# EAGLE board CT_schematic (EAGLE 7.6.0)

Size 100 x 80 mm. Coordinates in mm from the lower left corner, seen from the top.
Outline: 0,0 100,0 100,80 0,80 0,0
Copper layers (1*16): Top 0.035mm / dielectric 1.5mm / Bottom 0.035mm
Design rules "default": minimum track width 10mil, minimum drill 24mil, track to track 8mil, track to pad 8mil, pad to pad 8mil, via to via 8mil, smd to smd 8mil, copper to edge 40mil, drill to drill 8mil, minimum pad ring 10mil, minimum via ring 8mil, stop-mask expansion 4mil, vias tented up to drill 0mil, thermal gap 10mil

## Footprints (pad centres in the part's own frame; a part is rotated, then mirrored left to right if it is on the bottom)
C0603 = smd 0.8 x 0.8: 1 -0.762,0; 2 0.762,0
C0402 = smd 0.5 x 0.5: 1 -0.508,0; 2 0.508,0
C1210 = smd 1.2 x 2.5: 1 -1.524,0; 2 1.524,0
C0805 = smd 1.2 x 1.3: 1 -1.016,0; 2 1.016,0
C1206 = smd 1.3 x 1.6: 1 -1.524,0; 2 1.524,0
L0603 = smd 0.8 x 0.8: 1 -0.762,0; 2 0.762,0
DR1040 = smd 1.6 x 3.2: 1 -4.458,0; 2 4.458,0
L1210 = smd 1.2 x 2.5: 1 -1.524,0; 2 1.524,0
R0603 = smd 0.8 x 0.8: 1 -0.762,0; 2 0.762,0
LQFP100 = smd 0.3 x 1.2: 1 -6,-7.75; 2 -5.5,-7.75; 3 -5,-7.75; 4 -4.5,-7.75; 5 -4,-7.75; 6 -3.5,-7.75; 7 -3,-7.75; 8 -2.5,-7.75; 9 -2,-7.75; 10 -1.5,-7.75; 11 -1,-7.75; 12 -0.5,-7.75; 13 0,-7.75; 14 0.5,-7.75; 15 1,-7.75; 16 1.5,-7.75; 17 2,-7.75; 18 2.5,-7.75; 19 3,-7.75; 20 3.5,-7.75; 21 4,-7.75; 22 4.5,-7.75; 23 5,-7.75; 24 5.5,-7.75; 25 6,-7.75; 51 6,7.75; 52 5.5,7.75; 53 5,7.75; 54 4.5,7.75; 55 4,7.75; 56 3.5,7.75; 57 3,7.75; 58 2.5,7.75; 59 2,7.75; 60 1.5,7.75; 61 1,7.75; 62 0.5,7.75; 63 0,7.75; 64 -0.5,7.75; 65 -1,7.75; 66 -1.5,7.75; 67 -2,7.75; 68 -2.5,7.75; 69 -3,7.75; 70 -3.5,7.75; 71 -4,7.75; 72 -4.5,7.75; 73 -5,7.75; 74 -5.5,7.75; 75 -6,7.75 | smd 1.2 x 0.3: 26 7.75,-6; 27 7.75,-5.5; 28 7.75,-5; 29 7.75,-4.5; 30 7.75,-4; 31 7.75,-3.5; 32 7.75,-3; 33 7.75,-2.5; 34 7.75,-2; 35 7.75,-1.5; 36 7.75,-1; 37 7.75,-0.5; 38 7.75,0; 39 7.75,0.5; 40 7.75,1; 41 7.75,1.5; 42 7.75,2; 43 7.75,2.5; 44 7.75,3; 45 7.75,3.5; 46 7.75,4; 47 7.75,4.5; 48 7.75,5; 49 7.75,5.5; 50 7.75,6; 76 -7.75,6; 77 -7.75,5.5; 78 -7.75,5; 79 -7.75,4.5; 80 -7.75,4; 81 -7.75,3.5; 82 -7.75,3; 83 -7.75,2.5; 84 -7.75,2; 85 -7.75,1.5; 86 -7.75,1; 87 -7.75,0.5; 88 -7.75,0; 89 -7.75,-0.5; 90 -7.75,-1; 91 -7.75,-1.5; 92 -7.75,-2; 93 -7.75,-2.5; 94 -7.75,-3; 95 -7.75,-3.5; 96 -7.75,-4; 97 -7.75,-4.5; 98 -7.75,-5; 99 -7.75,-5.5; 100 -7.75,-6
SOIC-8 = smd 1.6 x 0.6: 1 -2.7,1.905 | smd 1.55 x 0.6: 2 -2.7,0.635; 3 -2.7,-0.635; 4 -2.7,-1.905; 5 2.7,-1.905; 6 2.7,-0.635; 7 2.7,0.635; 8 2.7,1.905
SAMTEC_FTSH-105-01-L-DV-K = smd 0.762 x 2.794: 1 -2.54,-2.032; 2 -2.54,2.032; 3 -1.27,-2.032; 4 -1.27,2.032; 5 0,-2.032; 6 0,2.032; 7 1.27,-2.032; 8 1.27,2.032; 9 2.54,-2.032; 10 2.54,2.032
182-009-MALE = drill 1.194 pad 1.524 octagon: 1 -5.537,10.923; 2 -2.769,10.923; 3 0,10.923; 4 2.769,10.923; 5 5.537,10.923; 6 -4.153,8.08; 7 -1.384,8.08; 8 1.384,8.08; 9 4.153,8.08 | hole 3.048: -12.446,9.501; 12.446,9.501
WFDN-8 = smd 0.48 x 0.7: 1 0,0; 2 1.27,0; 3 2.54,0; 4 3.81,0; 5 3.81,4.45; 6 2.54,4.45; 7 1.27,4.45; 8 0,4.45 | smd 4 x 3: 9 1.89,2.25
FCI_10118193-0001LF = smd 0.4 x 1.35: 1 -1.3,2.675; 2 -0.65,2.675; 3 0,2.675; 4 0.65,2.675; 5 1.3,2.675 | smd 1.6 x 1.4: 6 -3.2,2.45; 7 3.2,2.45 | smd 1.9 x 1.9: 8 -1.2,0; 9 1.2,0 | hole 0.5: -3.3,0; 3.3,0
SOT143B = smd 1 x 0.7: 1 -0.75,-1 | smd 0.6 x 0.7: 2 0.95,-1; 3 0.95,1; 4 -0.95,1
QFN-28 = smd 0.813 x 0.305: 1 -2.451,1.5; 2 -2.451,1; 3 -2.451,0.5; 4 -2.451,0; 5 -2.451,-0.5; 6 -2.451,-1; 7 -2.451,-1.5; 15 2.451,-1.5; 16 2.451,-1; 17 2.451,-0.5; 18 2.451,0; 19 2.451,0.5; 20 2.451,1; 21 2.451,1.5 | smd 0.305 x 0.813: 8 -1.5,-2.451; 9 -1,-2.451; 10 -0.5,-2.451; 11 0,-2.451; 12 0.5,-2.451; 13 1,-2.451; 14 1.5,-2.451; 22 1.5,2.451; 23 1,2.451; 24 0.5,2.451; 25 0,2.451; 26 -0.5,2.451; 27 -1,2.451; 28 -1.5,2.451 | smd 3.607 x 3.607: 29 0,0
SJ-43515TS-SMT-TR = smd 2.2 x 3: 1 0.6,-7.4; 4 3.4,-7.4 | smd 3 x 3: 2 12.8,-7.4; 5 17,-3 | smd 2 x 3: 3 5.3,0; 6 2.5,0 | drill 1.8: P$7 4.5,-3.69; P$8 11.54,-3.69
ABS07-32.768KHZ-7-T = smd 1.1 x 2.4: 1 -2.5,0; 2 0,0
ABLS-25.000MHZ-B2F-T = smd 5.6 x 2.8: 1 -3.81,0; 2 5.69,0
ASFL1 = smd 1.7 x 1.5: 1 -1.27,-1.1; 2 1.27,-1.1; 3 1.27,1.1; 4 -1.27,1.1
TSOT-23-5 = smd 1.3 x 0.62: 1 -1.31,0.95; 2 -1.31,0; 3 -1.31,-0.95; 4 1.31,-0.95; 5 1.31,0.95
DFN-8_DDB = smd 0.805 x 0.3: 1 -0.952,0.75; 2 -0.952,0.25; 3 -0.952,-0.25; 4 -0.952,-0.75; 5 0.952,-0.75; 6 0.952,-0.25; 7 0.952,0.25; 8 0.952,0.75 | smd 0.61 x 2.2: 9 0,0
DFN8_2X3MC = smd 0.813 x 0.305: 1 -1.398,0.75; 2 -1.398,0.25; 3 -1.398,-0.25; 4 -1.398,-0.75; 5 1.398,-0.75; 6 1.398,-0.25; 7 1.398,0.25; 8 1.398,0.75 | smd 1.753 x 1.549: 9 0,0
JST-2-SMD = smd 1 x 4.6: 1 -1,-3.7; 2 1,-3.7 | smd 1.6 x 3.4: NC1 -3.4,1.5; NC2 3.4,1.5
SON-6 = smd 0.55 x 0.3: 1 -0.355,0.5 | smd 0.52 x 0.3: 2 -0.37,0; 3 -0.37,-0.5; 4 0.37,-0.5; 5 0.37,0; 6 0.37,0.5
SW_4-1437565-2 = smd 1.4 x 2.1: 1 -2.23,4.55; 2 -2.23,-4.55; 3 2.23,4.55; 4 2.23,-4.55
LGM67K-G1J2-24-Z = smd 0.8 x 1.4: A -2,0; C 0,0
NC7SZ125M5X = smd 1.3 x 0.7: 1 -1.3,0.95; 2 -1.3,0; 3 -1.3,-0.95; 4 1.3,-0.95; 5 1.3,0.95

## Placement (x,y rotation side)
C1  1e-06  [C0603]  -19.05,91.44 0 top  (outside the outline)
C2  1e-07  [C0603]  -22.86,91.44 0 top  (outside the outline)
C3  1e-07  [C0603]  -26.67,91.44 0 top  (outside the outline)
C4  1e-07  [C0603]  -30.48,91.44 0 top  (outside the outline)
C5  1e-07  [C0603]  -34.29,91.44 0 top  (outside the outline)
C6  1e-07  [C0603]  -38.1,91.44 0 top  (outside the outline)
C7  1e-07  [C0603]  -41.91,91.44 0 top  (outside the outline)
C8  4.7e-06  [C0603]  -74.93,86.36 0 top  (outside the outline)
C9  2.2e-06  [C0603]  -78.74,86.36 0 top  (outside the outline)
C10  2.2e-06  [C0603]  -82.55,86.36 0 top  (outside the outline)
C11  1e-08  [C0603]  -45.72,91.44 0 top  (outside the outline)
C12  1e-06  [C0603]  -49.53,91.44 0 top  (outside the outline)
C13  1e-07  [C0603]  -53.34,91.44 0 top  (outside the outline)
C14  1e-11  [C0402]  -19.05,96.52 0 top  (outside the outline)
C15  1e-11  [C0402]  -22.86,96.52 0 top  (outside the outline)
C16  1e-11  [C0402]  -26.67,96.52 0 top  (outside the outline)
C17  1e-11  [C0402]  -30.48,96.52 0 top  (outside the outline)
C19  1e-08  [C0402]  -34.29,96.52 0 top  (outside the outline)
C20  1e-07  [C0402]  -38.1,96.52 0 top  (outside the outline)
C21  1e-06  [C0603]  -57.15,91.44 0 top  (outside the outline)
C22  1e-06  [C0603]  -60.96,91.44 0 top  (outside the outline)
C23  1e-07  [C0402]  -41.91,96.52 0 top  (outside the outline)
C24  2.2e-05  [C1210]  -16.51,74.93 0 top  (outside the outline)
C25  2.2e-05  [C1210]  -22.86,74.93 0 top  (outside the outline)
C26  1e-09  [C0402]  -45.72,96.52 0 top  (outside the outline)
C27  1e-09  [C0402]  -49.53,96.52 0 top  (outside the outline)
C28  1e-07  [C0402]  -53.34,96.52 0 top  (outside the outline)
C29  1e-07  [C0402]  -57.15,96.52 0 top  (outside the outline)
C30  1e-07  [C0402]  -60.96,96.52 0 top  (outside the outline)
C31  1e-07  [C0402]  -64.77,96.52 0 top  (outside the outline)
C32  1e-07  [C0402]  -68.58,96.52 0 top  (outside the outline)
C33  1e-05  [C0805]  -66.04,73.66 0 top  (outside the outline)
C34  1e-05  [C0805]  -71.12,73.66 0 top  (outside the outline)
C35  1e-05  [C0805]  -76.2,73.66 0 top  (outside the outline)
C36  1e-05  [C0805]  -81.28,73.66 0 top  (outside the outline)
C37  1e-05  [C0805]  -86.36,73.66 0 top  (outside the outline)
C38  1e-08  [C0402]  -72.39,96.52 0 top  (outside the outline)
C39  1e-05  [C0805]  -15.24,81.28 0 top  (outside the outline)
C40  1e-05  [C0805]  -20.32,81.28 0 top  (outside the outline)
C41  1e-05  [C1210]  -29.21,74.93 0 top  (outside the outline)
C42  2.2e-06  [C0603]  -86.36,86.36 0 top  (outside the outline)
C43  2.2e-07  [C0603]  -15.24,91.44 0 top  (outside the outline)
C44  1e-07  [C0402]  -76.2,96.52 0 top  (outside the outline)
C45  1e-05  [C1206]  -41.91,74.93 0 top  (outside the outline)
C46  1e-05  [C1206]  -48.26,74.93 0 top  (outside the outline)
C47  1e-08  [C0402]  -80.01,96.52 0 top  (outside the outline)
C48  1e-08  [C0402]  -83.82,96.52 0 top  (outside the outline)
F1  240.0  [L0603]  -64.77,91.44 0 top  (outside the outline)
I1  2.5e-06  [DR1040]  -66.04,43.18 0 top  (outside the outline)
I2  1e-05  [L1210]  -35.56,74.93 0 top  (outside the outline)
R2  1000.0  [R0603]  -68.58,91.44 0 top  (outside the outline)
R4  4700.0  [R0603]  -72.39,91.44 0 top  (outside the outline)
R5  10000.0  [R0603]  -78.74,80.01 0 top  (outside the outline)
R6  10000.0  [R0603]  -83.82,80.01 0 top  (outside the outline)
R7  10000.0  [R0603]  -88.9,80.01 0 top  (outside the outline)
R8  10000.0  [R0603]  -15.24,86.36 0 top  (outside the outline)
R9  10000.0  [R0603]  -20.32,86.36 0 top  (outside the outline)
R10  10000.0  [R0603]  -25.4,86.36 0 top  (outside the outline)
R11  10000.0  [R0603]  -30.48,86.36 0 top  (outside the outline)
R12  10000.0  [R0603]  -35.56,86.36 0 top  (outside the outline)
R13  10000.0  [R0603]  -40.64,86.36 0 top  (outside the outline)
R14  5.0  [R0603]  -76.2,91.44 0 top  (outside the outline)
R15  120.0  [R0603]  -80.01,91.44 0 top  (outside the outline)
R16  100000.0  [R0603]  -38.1,80.01 0 top  (outside the outline)
R17  100000.0  [R0603]  -43.18,80.01 0 top  (outside the outline)
R18  100000.0  [R0603]  -48.26,80.01 0 top  (outside the outline)
R19  47000.0  [R0603]  -45.72,86.36 0 top  (outside the outline)
R20  47000.0  [R0603]  -50.8,86.36 0 top  (outside the outline)
R21  47000.0  [R0603]  -55.88,86.36 0 top  (outside the outline)
R22  680.0  [R0603]  -83.82,91.44 0 top  (outside the outline)
R23  220000.0  [R0603]  -53.34,80.01 0 top  (outside the outline)
R24  1000000.0  [R0603]  -33.02,80.01 0 top  (outside the outline)
R25  100000.0  [R0603]  -58.42,80.01 0 top  (outside the outline)
R26  560000.0  [R0603]  -63.5,80.01 0 top  (outside the outline)
R27  10000.0  [R0603]  -60.96,86.36 0 top  (outside the outline)
R28  10000.0  [R0603]  -66.04,86.36 0 top  (outside the outline)
R29  9100.0  [R0603]  -87.63,91.44 0 top  (outside the outline)
R30  680000.0  [R0603]  -68.58,80.01 0 top  (outside the outline)
R31  120000.0  [R0603]  -73.66,80.01 0 top  (outside the outline)
R32  2000.0  [R0603]  -15.24,96.52 0 top  (outside the outline)
R33  10000.0  [R0603]  -71.12,86.36 0 top  (outside the outline)
U1  STM32F479VIT6  [LQFP100]  -63.5,8.89 0 top  (outside the outline)
U2  AT25M01-SSHM-T  [SOIC-8]  -45.72,57.15 0 top  (outside the outline)
U3  FTSH-105-01-L-DV-K  [SAMTEC_FTSH-105-01-L-DV-K]  -35.56,30.48 0 top  (outside the outline)
U4  MCP2562-E/SN  [SOIC-8]  -59.69,57.15 0 top  (outside the outline)
U5  182-009-113R531  [182-009-MALE]  -36.83,6.35 0 top  (outside the outline)
U6  SST26VF032B-104I/MF  [WFDN-8]  -31.75,54.61 0 top  (outside the outline)
U7  10118193-0001LF  [FCI_10118193-0001LF]  -19.05,66.04 0 top  (outside the outline)
U8  prtr5v0u2ax  [SOT143B]  -24.13,101.6 0 top  (outside the outline)
U9  WM8731CLSEFL  [QFN-28]  -82.55,66.04 0 top  (outside the outline)
U10  SJ-43515TS-SMT-TR  [SJ-43515TS-SMT-TR]  -68.58,31.75 0 top  (outside the outline)
U11  SJ-43515TS-SMT-TR  [SJ-43515TS-SMT-TR]  -39.37,46.99 0 top  (outside the outline)
U12  ABS07-32.768KHZ-7-T  [ABS07-32.768KHZ-7-T]  -60.96,66.04 0 top  (outside the outline)
U13  ABLS-25.000MHZ-B2F-T  [ABLS-25.000MHZ-B2F-T]  -38.1,66.04 0 top  (outside the outline)
U14  ASFL1-12.288MHZ-EC-T  [ASFL1]  -81.28,57.15 0 top  (outside the outline)
U15  ltc3406es5  [TSOT-23-5]  -25.4,80.01 0 top  (outside the outline)
U16  LT3494AEDDB#TRMPBF  [DFN-8_DDB]  -87.63,96.52 0 top  (outside the outline)
U17  MCP73831T-2ACI/MC  [DFN8_2X3MC]  -34.29,100.33 0 top  (outside the outline)
U18  S2B-PH-SM4-TB(LF)(SN)  [JST-2-SMD]  -81.28,44.45 0 top  (outside the outline)
U19  TPS3895ADRYR  [SON-6]  -27.94,100.33 0 top  (outside the outline)
U20  4-1437565-2  [SW_4-1437565-2]  -55.88,43.18 0 top  (outside the outline)
U21  Q65110A2395  [LGM67K-G1J2-24-Z]  -69.85,66.04 0 top  (outside the outline)
U22  nc7sz125m5x  [NC7SZ125M5X]  -53.34,73.66 0 top  (outside the outline)
U23  nc7sz125m5x  [NC7SZ125M5X]  -59.69,73.66 0 top  (outside the outline)

## Library data of the parts
C1-C17 C19-C48 F1 I1 I2 R2 R4-R33 U1-U23 = circuit_tree

## Nets
CLK_CRYSTAL_U1_5: C14.1 U1.5 U12.1
CLK_CRYSTAL_U1_6: C15.1 U1.6 U12.2
CLK_CRYSTAL_U1_9: C16.1 U1.9 U13.1
CLK_CRYSTAL_U1_10: C17.1 U1.10 U13.2
CLK_U9_1: U9.1 U14.3
GND: C1.2 C2.2 C3.2 C4.2 C5.2 C6.2 C7.2 C8.2 C9.2 C10.2 C11.2 C12.2 C13.2 C14.2 C15.2 C16.2 C17.2 C19.2 C20.2 C21.2 C22.2 C23.2 C27.2 C28.2 C29.2 C30.2 C31.2 C32.2 C33.2 C34.2 C35.2 C36.2 C37.2 C38.2 C39.2 C40.1 C40.2 C41.2 C42.2 C43.2 C44.2 C45.2 C46.2 C47.2 C48.2 R2.2 R13.2 R14.2 R19.2 R20.2 R21.2 R23.2 R29.2 R31.2 R32.2 U1.2 U1.7 U1.16 U1.23 U1.44 U1.59 U1.78 U2.4 U3.3 U3.5 U4.2 U4.8 U5.5 U6.4 U6.9 U7.5 U7.6 U7.7 U7.8 U7.9 U8.1 U9.4 U9.15 U9.19 U9.25 U9.26 U9.29 U10.1 U11.1 U14.2 U15.2 U16.2 U16.9 U17.6 U17.9 U18.2 U19.2 U21.C U22.2 U22.3 U23.1 U23.3
INPUT_USBPOWER_5V: C45.1 R33.2 U7.1 U8.4 U17.1 U17.2
NET_U1_11: R4.1 U1.11 U23.4
NET_U1_18: C11.1 C12.1 F1.1 U1.17 U1.18
NET_U1_31: R6.1 U1.31
NET_U1_43: C9.1 U1.43
NET_U1_56: U1.56
NET_U1_62: U1.62
NET_U1_76: C10.1 U1.76
NET_U1_97: R5.1 U1.97
NET_U1_98: U21.A
NET_U1_99: U20.3 U20.4
NET_U2_3: R7.1 U2.3
NET_U2_7: R9.1 U2.7
NET_U3_9: R14.1 U3.9
NET_U4_6: R15.2 U4.6
NET_U5_2: R15.2 U4.6 U5.2
NET_U5_3: R15.1 U4.7 U5.3
NET_U9_9: U9.9
NET_U9_20: C32.1 C37.1 U9.20
NET_U10_2: C25.1 R20.1 U10.2
NET_U10_5: C24.1 R19.1 U10.5
NET_U10_13: C24.2
NET_U10_14: C25.2
NET_U11_5: C26.1 C27.1 R21.1 R22.1 U11.5
NET_U11_21: R22.2
NET_U11_22: C26.2
NET_U15_1: U15.1
NET_U15_3: I1.1 U15.3
NET_U15_5: R23.1 R24.1 U15.5
NET_U15_ATNET_3: I1.2 R24.2
NET_U16_1: I2.1 U16.1
NET_U16_5: R25.1 U16.5
NET_U16_6: R26.1 U16.6
NET_U16_8: C43.1 U16.8
NET_U17_5: R33.1 U17.5
NET_U17_8: R32.1 U17.8
NET_U19_1: R28.1 R29.1 U19.1
NET_U19_3: R30.2 R31.1 U19.3
NET_U19_4: R27.1 U19.4 U22.4 U23.2
NET_U20_1: R2.1 U20.1 U20.2
PROC_CAN1_RX: U1.84 U4.4
PROC_CAN1_TX: U1.85 U4.1
PROC_I2S2_CK: U1.47 U9.7
PROC_I2S2_EXT_SD: U1.14 U9.10
PROC_I2S2_SD: U1.13 U9.8
PROC_I2S2_WS: U1.46 U9.9 U9.11
PROC_QUADSPI_BK1_IO0: U1.69 U6.5
PROC_QUADSPI_BK1_IO1: U1.81 U6.2
PROC_QUADSPI_BK1_IO2: R17.1 U1.1 U6.3
PROC_QUADSPI_BK1_IO3: R18.1 U1.20 U6.7
PROC_QUADSPI_BK1_NCS: R16.1 U1.41 U6.1
PROC_QUADSPI_CLK: U1.28 U6.6
PROC_SPI1_MISO: U1.27 U2.2
PROC_SPI1_MOSI: U1.94 U2.5
PROC_SPI1_NSS: R8.1 U1.25 U2.1
PROC_SPI1_SCK: U1.26 U2.6
PROC_SYS_JTCK_SWCLK: R13.1 U1.79 U3.4
PROC_SYS_JTDI: R11.1 U1.80 U3.8
PROC_SYS_JTDO_SWO: U1.92 U3.6
PROC_SYS_JTMS_SWDIO: R12.1 U1.75 U3.2
PROC_USB_OTG_FS_DM: U7.2 U8.3
PROC_USB_OTG_FS_DP: U7.3 U8.2
RST_OUT_U3_JTAG_RST_B: R10.1 U3.10 U22.1
VCC_S1_3V7: C39.1 C41.1 C46.1 I2.2 R25.2 U15.4 U16.3 U16.4 U17.3 U17.4 U18.1
VCC_TIER1_3V3: C1.1 C2.1 C3.1 C4.1 C5.1 C6.1 C7.1 C8.1 C13.1 C19.1 C20.1 C22.1 C23.1 C28.1 C29.1 C30.1 C31.1 C33.1 C34.1 C35.1 C36.1 C38.1 C40.2 C44.1 C47.1 C48.1 F1.2 I1.2 R4.2 R5.2 R6.2 R7.2 R8.2 R9.2 R10.2 R11.2 R12.2 R16.2 R17.2 R18.2 R24.2 R27.2 R28.2 R30.1 U1.3 U1.8 U1.24 U1.45 U1.55 U1.65 U1.77 U1.100 U2.8 U3.1 U4.5 U6.8 U9.3 U9.5 U9.12 U9.18 U14.4 U19.6 U22.5 U23.5
VCC_TIER1_5V0: C21.1 C42.1 R26.2 U4.3 U16.7

## Tracks (layer width: path | path; a pad name or v marks a point on that pad's centre or on a via)
CLK_CRYSTAL_U1_5  (2 unrouted)
CLK_CRYSTAL_U1_6  (2 unrouted)
CLK_CRYSTAL_U1_9  (2 unrouted)
CLK_CRYSTAL_U1_10  (2 unrouted)
CLK_U9_1  (1 unrouted)
GND  (96 unrouted)
INPUT_USBPOWER_5V  (5 unrouted)
NET_U1_11  (2 unrouted)
NET_U1_18  (4 unrouted)
NET_U1_31  (1 unrouted)
NET_U1_43  (1 unrouted)
NET_U1_76  (1 unrouted)
NET_U1_97  (1 unrouted)
NET_U1_99  (1 unrouted)
NET_U2_3  (1 unrouted)
NET_U2_7  (1 unrouted)
NET_U3_9  (1 unrouted)
NET_U4_6  (1 unrouted)
NET_U5_2  (2 unrouted)
NET_U5_3  (2 unrouted)
NET_U9_20  (2 unrouted)
NET_U10_2  (2 unrouted)
NET_U10_5  (2 unrouted)
NET_U11_5  (4 unrouted)
NET_U15_3  (1 unrouted)
NET_U15_5  (2 unrouted)
NET_U15_ATNET_3  (1 unrouted)
NET_U16_1  (1 unrouted)
NET_U16_5  (1 unrouted)
NET_U16_6  (1 unrouted)
NET_U16_8  (1 unrouted)
NET_U17_5  (1 unrouted)
NET_U17_8  (1 unrouted)
NET_U19_1  (2 unrouted)
NET_U19_3  (2 unrouted)
NET_U19_4  (3 unrouted)
NET_U20_1  (2 unrouted)
PROC_CAN1_RX  (1 unrouted)
PROC_CAN1_TX  (1 unrouted)
PROC_I2S2_CK  (1 unrouted)
PROC_I2S2_EXT_SD  (1 unrouted)
PROC_I2S2_SD  (1 unrouted)
PROC_I2S2_WS  (2 unrouted)
PROC_QUADSPI_BK1_IO0  (1 unrouted)
PROC_QUADSPI_BK1_IO1  (1 unrouted)
PROC_QUADSPI_BK1_IO2  (2 unrouted)
PROC_QUADSPI_BK1_IO3  (2 unrouted)
PROC_QUADSPI_BK1_NCS  (2 unrouted)
PROC_QUADSPI_CLK  (1 unrouted)
PROC_SPI1_MISO  (1 unrouted)
PROC_SPI1_MOSI  (1 unrouted)
PROC_SPI1_NSS  (2 unrouted)
PROC_SPI1_SCK  (1 unrouted)
PROC_SYS_JTCK_SWCLK  (2 unrouted)
PROC_SYS_JTDI  (2 unrouted)
PROC_SYS_JTDO_SWO  (1 unrouted)
PROC_SYS_JTMS_SWDIO  (2 unrouted)
PROC_USB_OTG_FS_DM  (1 unrouted)
PROC_USB_OTG_FS_DP  (1 unrouted)
RST_OUT_U3_JTAG_RST_B  (2 unrouted)
VCC_S1_3V7  (10 unrouted)
VCC_TIER1_3V3  (63 unrouted)
VCC_TIER1_5V0  (4 unrouted)